# Altium PCB 3ER_PCB.PcbDoc (part 1 of 2)
Units mil, origin at the board's own origin, x right, y up, seen from the top; angles counter-clockwise.
Board outline 3500 x 3505 mil, 2 copper layers (Top Layer, Bottom Layer); 87 components, 62 nets, 335 pads, 137 vias.
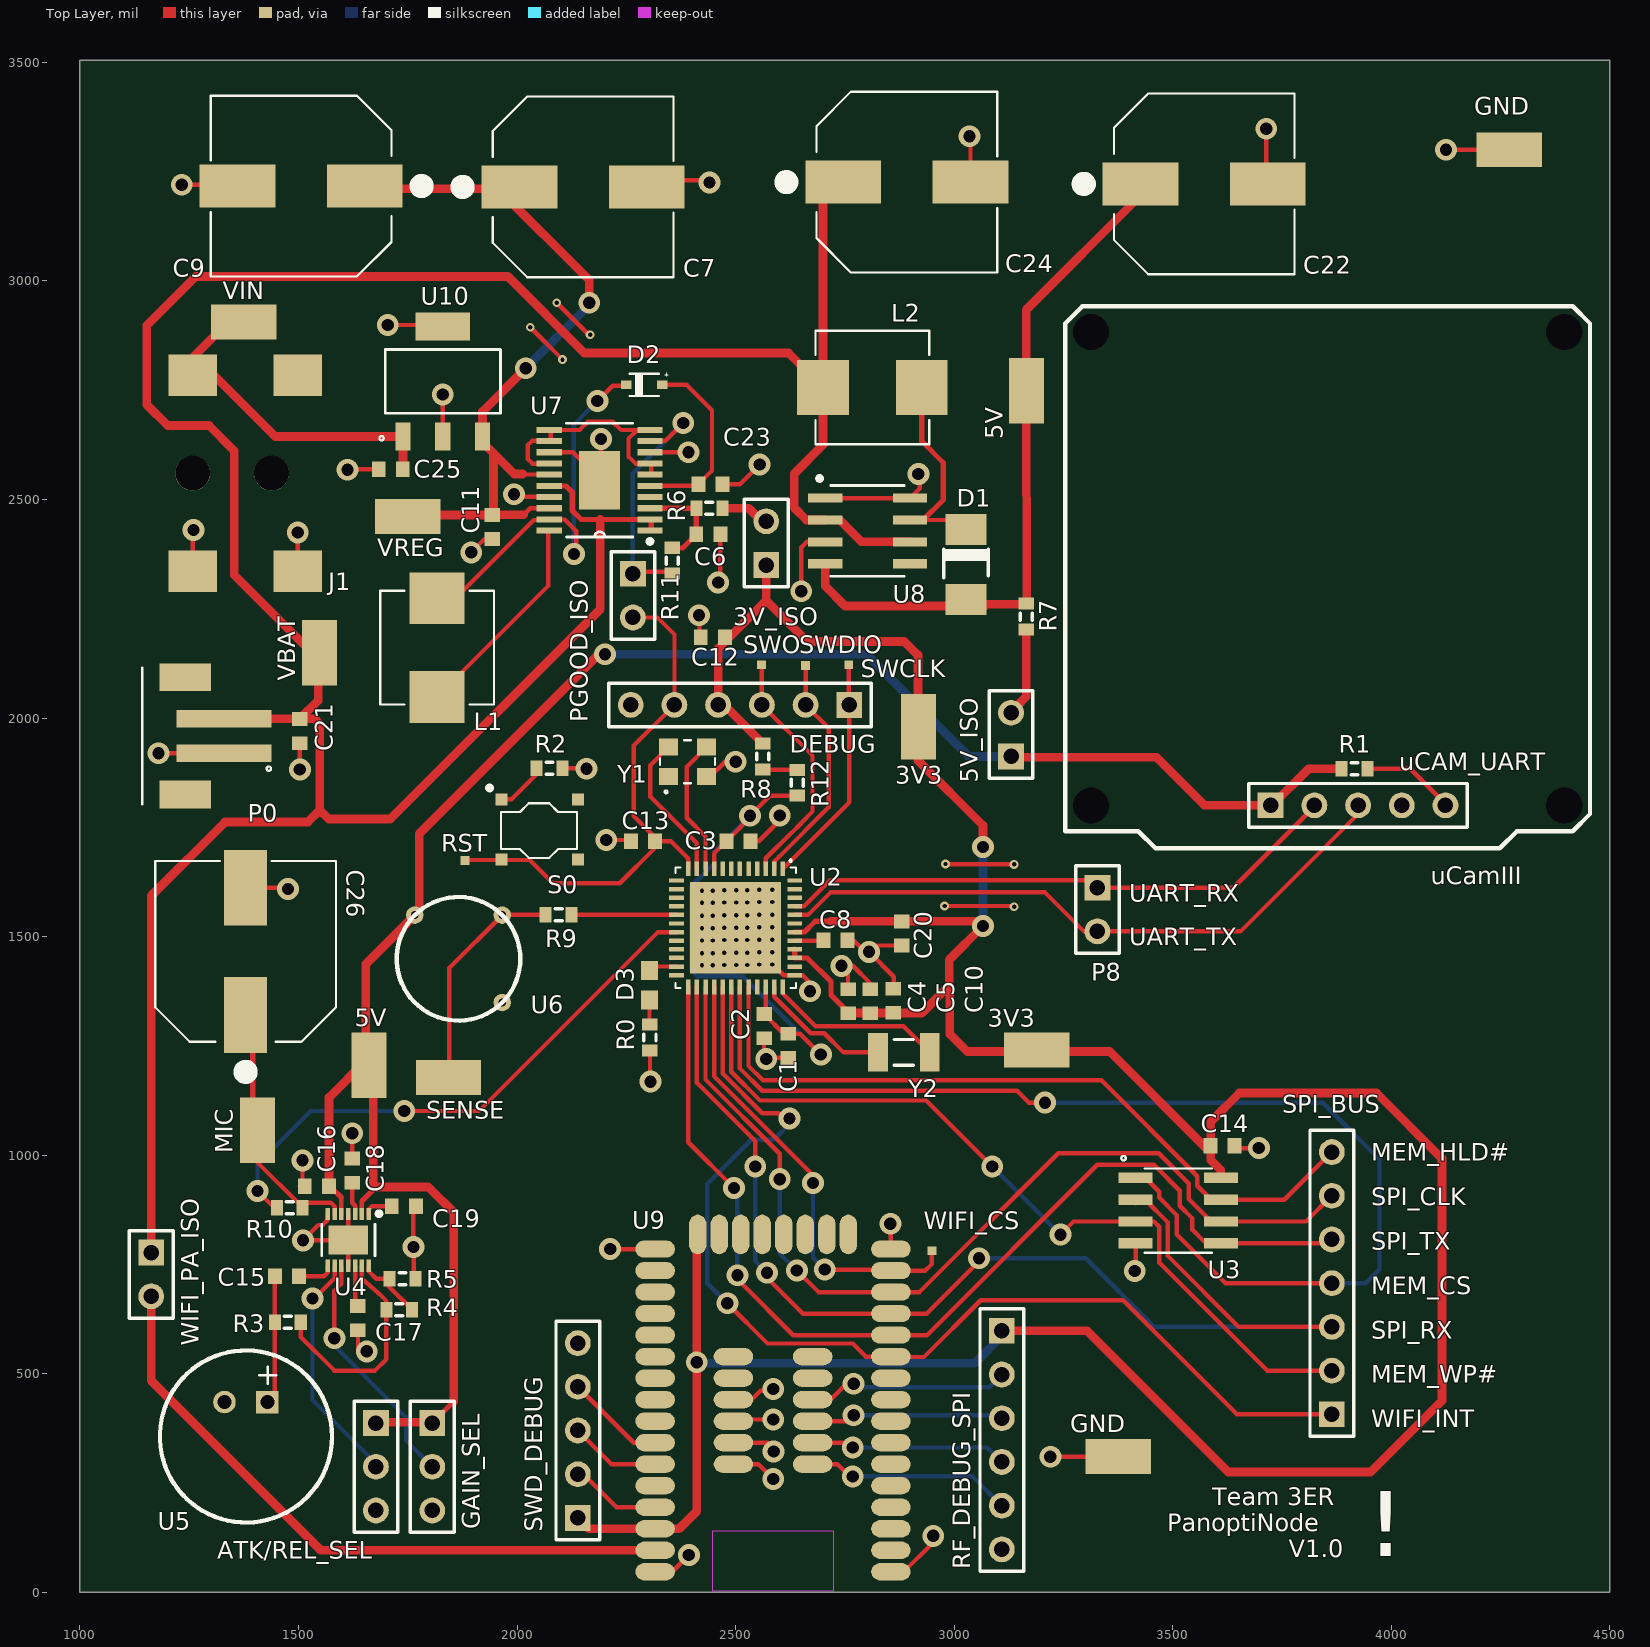
[diagram p0: Top Layer view]
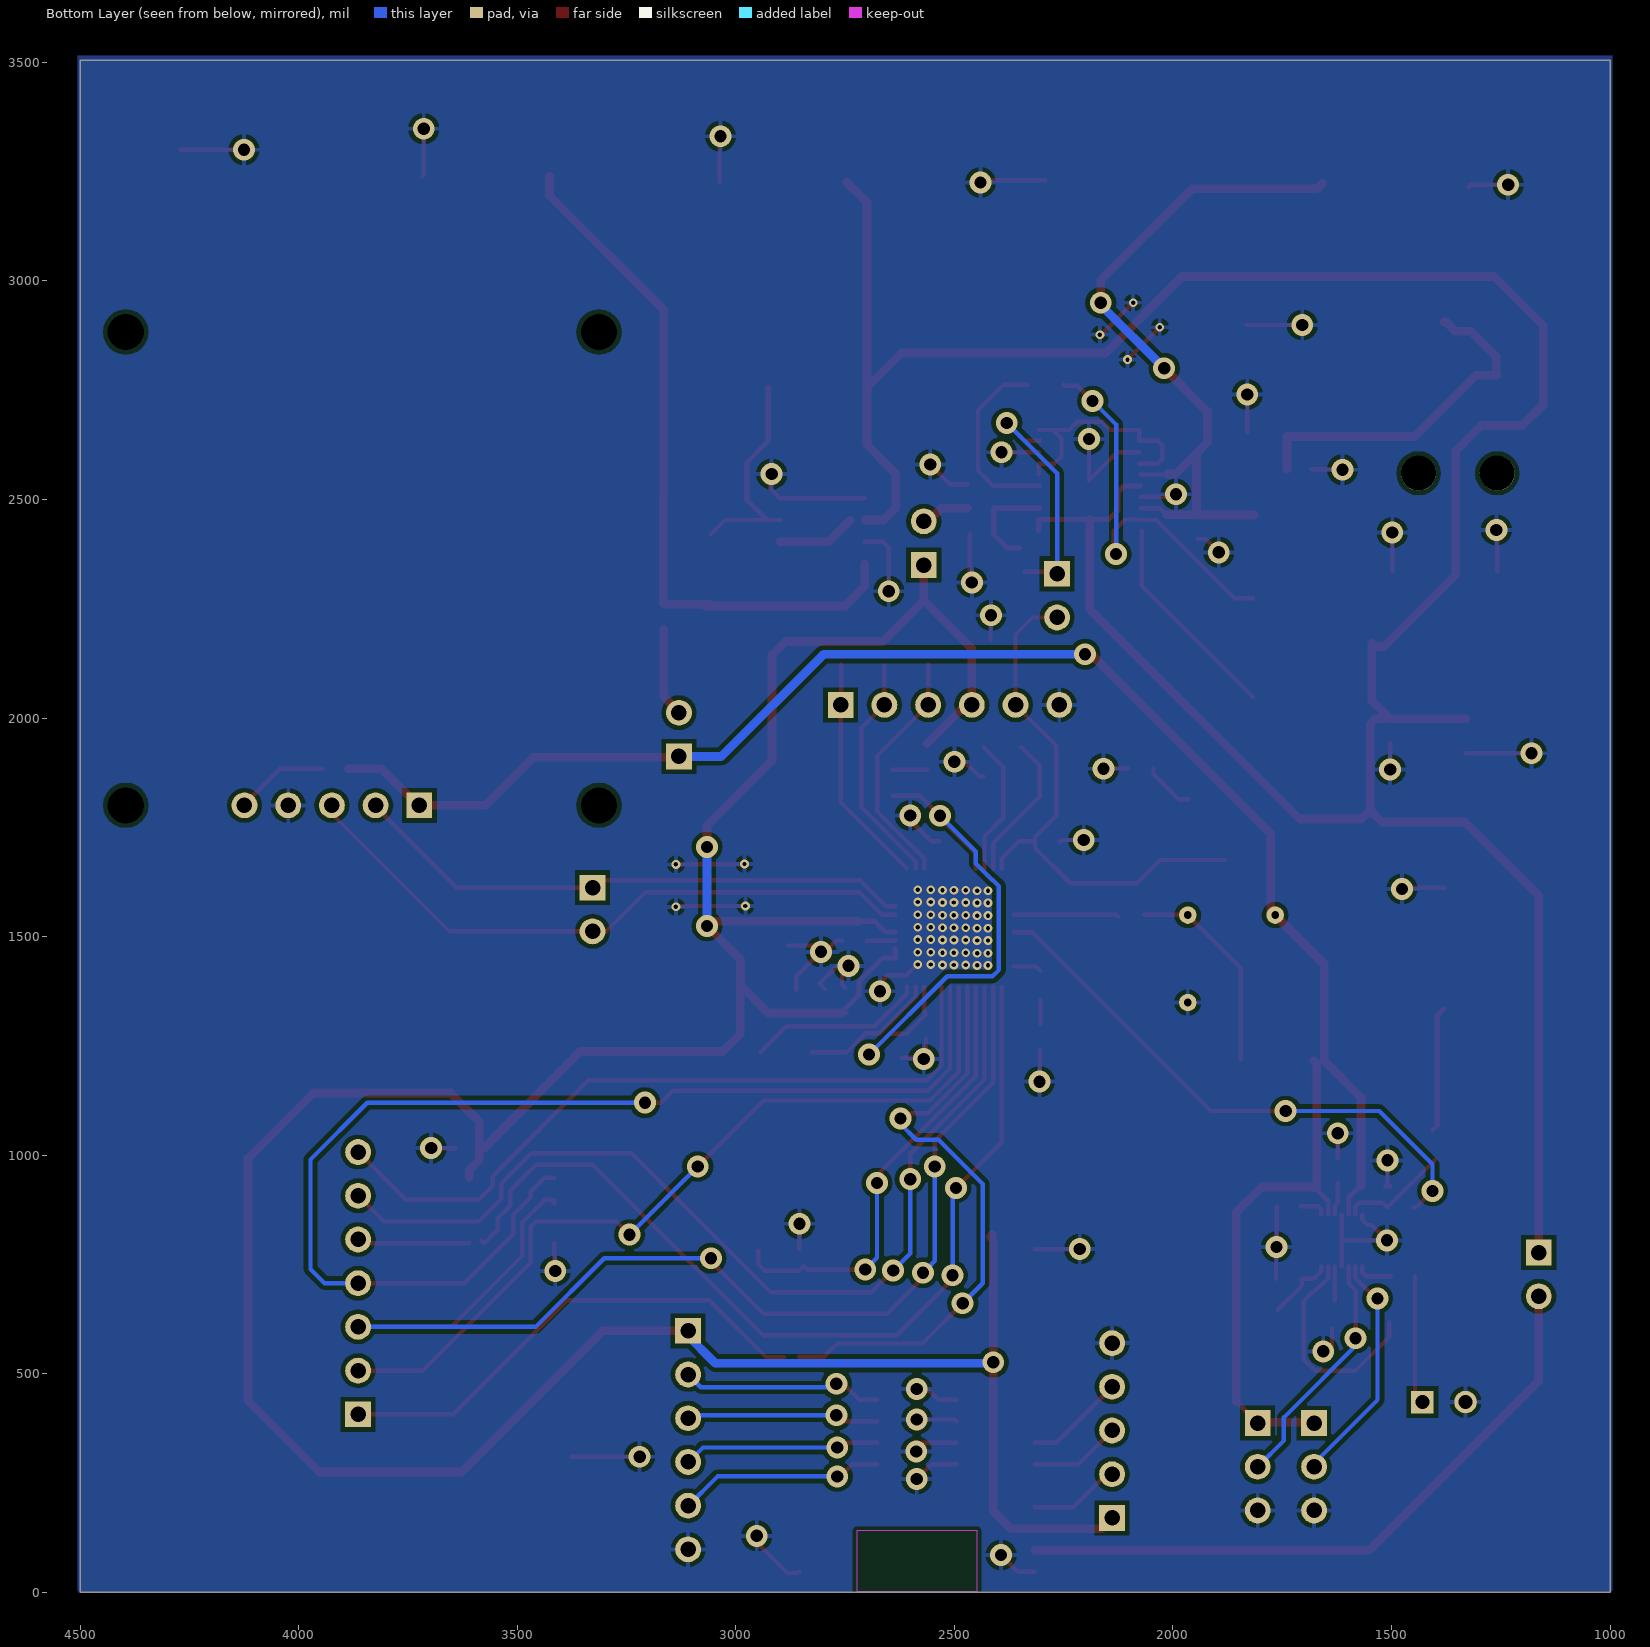
[diagram p1: Bottom Layer view, seen from below]

## Layer stack, top to bottom
Top Solder: solder mask 0.4, Solder Resist, Dk 3.5
Top Layer: signal copper 1.4
Dielectric 1: dielectric 12.6, FR-4, Dk 4.8
Bottom Layer: signal copper 1.4
Bottom Solder: solder mask 0.4, Solder Resist, Dk 3.5

## Board outline
1000,0 4500,0 4500,3505 1000,3505

## Design rules (kind name [scope] priority, off if disabled: settings)
Clearance Clearance_1 [InNamedPolygon('GND_L02_P002')] p1: gap=10 ignorepadtopadclearanceinfootprint=FALSE except(0: Arc-Hole Track-Hole SMDPad-Hole THPad-Hole Via-Hole Text-Hole)
Clearance [All] p2: gap=10 ignorepadtopadclearanceinfootprint=TRUE except(0: Arc-Hole Track-Hole SMDPad-Hole THPad-Hole Via-Hole Fill-Hole Poly-Hole Region-Hole Text-Hole; 5: Arc-Arc Arc-Track Arc-SMDPad Arc-THPad Track-Track Track-SMDPad Track-THPad SMDPad-SMDPad SMDPad-THPad SMDPad-Via SMDPad-Fill SMDPad-Poly SMDPad-Region SMDPad-Text THPad-THPad)
ComponentClearance uCam_Clearance [All vs HasFootprint('uCamIII')] p1: gap=0 collisioncheckmode=3 verticalgap=0 showdistances=FALSE
ComponentClearance [All] p2: gap=10 collisioncheckmode=3 verticalgap=10 showdistances=FALSE
MinimumSolderMaskSliver [All vs HasFootprint('No Footprint')] p1: minsoldermaskwidth=4
PolygonConnect Gnd_Via_Connect [IsVia AND InNet('GND');] p1: thpad.connectstyle=Direct thpad.reliefconductorwidth=10 thpad.reliefentries=4 thpad.polygonreliefangle="90 Angle" thpad.airgapwidth=10 smdpad.connectstyle=Relief smdpad.reliefconductorwidth=10 smdpad.reliefentries=4 smdpad.polygonreliefangle="90 Angle" smdpad.airgapwidth=10 via.connectstyle=Relief via.reliefconductorwidth=10 via.reliefentries=4 via.polygonreliefangle="90 Angle" via.airgapwidth=10
PolygonConnect [All] p2: connectstyle=Relief reliefconductorwidth=10 reliefentries=4 polygonreliefangle="90 Angle" airgapwidth=10
RoutingVias [All] p1: holewidth=12 width=24 viastyle="Through Hole" minholewidth=10 minwidth=20 maxholewidth=14 maxwidth=28
SilkToSilkClearance [All] p1: silktosilkclearance=4
SilkToSolderMaskClearance MotionSensorRule [All vs HasFootprint('AMN24112')] p1: minsilkscreentomaskgap=0 clearancetoexposedcopper=TRUE
SilkToSolderMaskClearance SilkToSolderMaskClearance_1 [IsPad] p2: minsilkscreentomaskgap=3 clearancetoexposedcopper=TRUE
SolderMaskExpansion [All] p1: expansion=4
Width Width_power [InNet('5V') OR InNet('VBAT') OR InNet('5V_OUT') OR InNet('DVDD') OR InNet('NetJ1_VIN0') OR InNet('NetP10_2') OR InNet('NetP11_2') OR InNet('NETC25_2') OR InNet('NetP9_2') OR InNet('NetC7_1');] p1: maxlimit=20 minlimit=10 preferedwidth=20
Width Width_signal [All] p2: maxlimit=12 minlimit=8 preferedwidth=10
26 further rules are at their usual default settings.

## Components (designator, comment, footprint, x,y, rotation, side; value= is the part's Value field where it differs from the comment)
3V3 "5019" TP380X203 2918,1980 r270 top (schematic designator TP1)
3V3 "5019" TP380X203 3189,1240 r180 top (schematic designator TP2)
3V_ISO "Header 2" HDR1X2 2570,2350 r90 top (schematic designator P9)
5V "5019" TP380X203 3165,2749 r90 top (schematic designator TP5)
5V "5019" TP380X203 1661,1206 r90 top (schematic designator TP4)
5V_ISO "Header 2" HDR1X2 3130,1912 r90 top (schematic designator P10)
ATK/REL_SEL "Header 3" HDR1X3 1677,387 r270 top (schematic designator P2)
C1 "Cap Semi" 1608[0603] 2620,1250 r90 top value=10uF
C2 "Cap Semi" 1608[0603] 2565,1295 r90 top value=10nF
C3 "Cap Semi" 1608[0603] 2506.56,1718 r180 top value=10nF
C4 "Cap Semi" 1608[0603] 2758,1352 r270 top value=10uF
C5 "Cap Semi" 1608[0603] 2808,1352 r270 top value=0.1uF
C6 "Cap Semi" 1608[0603] 2437.56,2420 r180 top value=47uF
C7 "MAL214699103E3" CAPAE1050X1050N 2151,3215 r0 top value=100uF
C8 "Cap Semi" 1608[0603] 2728.44,1491 r0 top value=1uF
C9 "MAL214699103E3" CAPAE1050X1050N 1506,3217 r180 top value=100uF
C10 "Cap Semi" 1608[0603] 2861,1353 r270 top value=0.1uF
C11 "Cap Semi" 1608[0603] 1943,2437 r90 top value=1uF
C12 "Cap Semi" 1608[0603] 2448,2185 r0 top value=10uF
C13 "Cap Semi" 1608[0603] 2288,1718 r0 top value=100nF
C14 "Cap Semi" 1608[0603] 3614,1021 r180 top value=100pF
C15 "Cap Semi" 1608[0603] 1473.56,723 r0 top value=0.1uF
C16 "" 1608[0603] 1542,929 r0 top value=1uF
C17 "" 1608[0603] 1635,627 r270 top value=0.47uF
C18 "" 1608[0603] 1623,964.56 r90 top value=2.2uF
C19 "" 1608[0603] 1741,883 r180 top value=0.1uF
C20 "Cap Semi" 1608[0603] 2880,1507 r90 top value=0.1uF
C21 "Cap Semi" 1608[0603] 1503,1970 r90 top value=1uF
C22 "MAL214699103E3" CAPAE1050X1050N 3572,3222 r0 top value=100uF
C23 "Cap Semi" 1608[0603] 2442.56,2535 r180 top value=2.2uF
C24 "MAL214699103E3" CAPAE1050X1050N 2891.67,3226 r0 top value=100uF
C25 "Cap Semi" 1608[0603] 1711,2569 r0 top value=0.1uF
C26 "MAL214699103E3" CAPAE1050X1050N 1379,1466 r90 top value=100uF
D1 "MBRS140" DO-214AC 3027,2351 r270 top
D2 "SOD2513X120N" SOD2513X120N 2291,2762 r0 top (schematic designator SchottkyDiode)
D3 "TLMO1100-GS08" 0603_TLMO1100-GS08(Primary) 2303,1388.54 r270 top
DEBUG "Header 6" HDR1X6 2760,2030 r180 top (schematic designator P1)
GAIN_SEL "Header 3" HDR1X3 1806,387 r270 top (schematic designator P3)
GND "5019" TP380X203 3375,310 r0 top (schematic designator TP8)
GND "5019" TP380X203 4270,3300 r0 top (schematic designator TP3)
J1 "" POWER_JACK_SMD 1258,2560 r0 top
L1 "Inductor" INDM7366X500 1817,2161.01 r90 top value=10uH
L2 "Inductor" INDM7366X500 2812.99,2756 r0 top value=10uH
MIC "5019" TP380X203 1406,1057 r90 top (schematic designator TP7)
P0 "B2B-PH-SM4-TB" JST_B2B-PH-SM4-TB 1329.58,1958.86 r90 top
P8 "UART_Header" HDR1X2 3327.76,1611.81 r270 top
PGOOD_ISO "Header 2" HDR1X2 2265,2330 r270 top (schematic designator P12)
R0 "Res3" J1-0603 2304,1269 r90 top value=1K
R1 "" J1-0603 3916,1884 r180 top value=0
R2 "Res3" J1-0603 2074,1885 r180 top value=1k
R3 "Res3" J1-0603 1475.53,618 r0 top value=2.2K
R4 "Res3" J1-0603 1730.53,646 r180 top value=150K
R5 "Res3" J1-0603 1738,717 r180 top value=100K
R6 "Ferrite Bead" J1-0603 2440,2480 r0 top value=0
R7 "Ferrite Bead" J1-0603 3165,2232 r90 top value=0
R8 "Ferrite Bead" J1-0603 2562,1912 r90 top value=p/n:74279266
R9 "Res3" J1-0603 2095,1550 r180 top value=0
R10 "Res3" J1-0603 1480,880 r0 top value=0
R11 "Res3" J1-0603 2355,2360 r270 top value=1M
R12 "Res3" J1-0603 2641,1852 r270 top value=1
RF_DEBUG_SPI "Header 6" HDR1X6 3109,598 r270 top (schematic designator P5)
RST "SparkFun Test Points    Bare copper test points for troubleshooting or In-Circuit-Testing. These are used by our Production team for verifying production board runs using pogo-pins on test beds.   SparkFun Products: SparkFun LSM9DS1 Breakout  SparkFun PSOC  SparkFun Load Cell Amplifier" PAD.02X.02 1881,1674 r90 top (schematic designator TP23)
S0 "TL3315NF100Q" TL3315NF100Q 2052,1745 r0 top (schematic designator S1)
SENSE "5019" TP380X203 1843,1178 r0 top (schematic designator TP6)
SPI_BUS "SPI_Header" HDR1X7 3864,407 r90 top (schematic designator P7)
SWCLK "SparkFun Test Points    Bare copper test points for troubleshooting or In-Circuit-Testing. These are used by our Production team for verifying production board runs using pogo-pins on test beds.   SparkFun Products: SparkFun LSM9DS1 Breakout  SparkFun PSOC  SparkFun Load Cell Amplifier" PAD.02X.02 2759,2122 r90 top (schematic designator TP19)
SWD_DEBUG "Header 5" HDR1X5 2139,170 r90 top (schematic designator P6)
SWDIO "SparkFun Test Points    Bare copper test points for troubleshooting or In-Circuit-Testing. These are used by our Production team for verifying production board runs using pogo-pins on test beds.   SparkFun Products: SparkFun LSM9DS1 Breakout  SparkFun PSOC  SparkFun Load Cell Amplifier" PAD.02X.02 2660,2120 r90 top (schematic designator TP20)
SWO "SparkFun Test Points    Bare copper test points for troubleshooting or In-Circuit-Testing. These are used by our Production team for verifying production board runs using pogo-pins on test beds.   SparkFun Products: SparkFun LSM9DS1 Breakout  SparkFun PSOC  SparkFun Load Cell Amplifier" PAD.02X.02 2559,2122 r90 top (schematic designator TP21)
U2 "EFM32PG12B500F1024GM48-B" QFN50P700X700X90-49N 2500,1520 r270 top
U3 "SST25VF010A" SST25VF010A 3512.56,873 r0 top
U4 "MAX9814ETD+T" DFN300X300X80-15N 1614,806 r270 top
U5 "" CMA-4544PF-W 1379.79,356.26 r90 top
U6 "AMN24112" AMN24112 1866,1449 r270 top
U7 "LTC3106" LTC3106 2189,2544 r180 top
U8 "LT1300CS8PBF" SOIC-8_S 2802,2428 r0 top
U9 "" WGM110_PAC 2585.55,415.89 r180 top
U10 "LM2937IMPX-5.0/NOPB" SOT230P700X180-4N 1830,2770 r90 top
uCAM_UART "uCamIII_HEADER" uCamIII_Header 3724,1800.2 r0 top (schematic designator U1)
uCamIII "uCamIII" uCamIII 3312.99,1800.2 r0 top
VBAT "5019" TP380X203 1548,2149 r90 top (schematic designator TP9)
VIN "5019" TP380X203 1375,2906 r0 top (schematic designator TP10)
VREG "5019" TP380X203 1750,2461 r180 top (schematic designator TP11)
WIFI_CS "SparkFun Test Points    Bare copper test points for troubleshooting or In-Circuit-Testing. These are used by our Production team for verifying production board runs using pogo-pins on test beds.   SparkFun Products: SparkFun LSM9DS1 Breakout  SparkFun PSOC  SparkFun Load Cell Amplifier" PAD.02X.02 2949,781 r0 top (schematic designator 15)
WIFI_PA_ISO "Header 2" HDR1X2 1163,777 r270 top (schematic designator P11)
Y1 "ASFLMB-40.000MHZ-LR-T" OSCSC320X250X100N 2390,1900 r90 top
Y2 "32.768K" XTAL320X150X90N 2885,1235 r180 top

## Footprints (in the part's own frame and the unit in brackets; to place one, negate y for a bottom-side part, rotate by r counter-clockwise, add the part's x,y. Pads: shape width x height; smd on the part's side, far side on the other; paste and mask are expansions set on the pad)
0603_TLMO1100-GS08(Primary) [mm]
  rect 1.1x1 smd: 1(-0.85,0) 2(0.85,0)
1608[0603] [mm] "Chip Capacitor, Body 1.6x0.8mm, IPC High Density"
  rect 0.8x0.9 smd: 1(-0.7,0) 2(0.7,0)
  body extent -0.87,-0.48 0.87,0.48, height 1.3
AMN24112 [mil]
  round 40 hole 18: 1(-100,-100) 2(100,100) 3(-100,100)
  silkscreen extent -141,-141 141,141
CAPAE1050X1050N [mm]
  rect 4.4x2.5 smd: 1(-3.7,0) 2(3.7,0)
  silkscreen extent -7.35,-5.25 5.25,5.25
CMA-4544PF-W [mm]
  rect 1.308x1.308 hole 0.8: 1(2,-1.25)
  round 1.308 hole 0.8: 2(2,1.25)
  silkscreen extent -5,-5 5,5
DFN300X300X80-15N [mil]
  rect 28x10 smd: 1(-59,47) 2(-59,31) 3(-59,16) 4(-59,0) 5(-59,-16) 6(-59,-31) 7(-59,-47) 8(59,-47) 9(59,-31) 10(59,-16) 11(59,0) 12(59,16) 13(59,31) 14(59,47)
  rect 67x91 smd: 15(0,0)
  silkscreen extent -65,-61 36,75
DO-214AC [mm]
  rect 1.8x2.4 smd: 1(-2.025,0) 2(2.025,0)
  silkscreen extent -0.89,-1.3 0.76,1.3
HDR1X2 [mm] "Connector; Header; 2 Position"
  rect 1.5x1.5 hole 0.9: 1(0,0)
  round 1.5 hole 0.9: 2(2.54,0)
  silkscreen extent -1.27,-1.27 3.81,1.27
HDR1X3 [mm] "Connector; Header; 3 Position"
  rect 1.5x1.5 hole 0.9: 1(0,0)
  round 1.5 hole 0.9: 2(2.54,0) 3(5.08,0)
  silkscreen extent -1.27,-1.27 6.35,1.27
HDR1X5 [mm] "Connector; Header; 5 Position"
  rect 1.5x1.5 hole 0.9: 1(0,0)
  round 1.5 hole 0.9: 2(2.54,0) 3(5.08,0) 4(7.62,0) 5(10.16,0)
  silkscreen extent -1.27,-1.27 11.43,1.27
HDR1X6 [mm] "Connector; Header; 6 Position"
  rect 1.5x1.5 hole 0.9: 1(0,0)
  round 1.5 hole 0.9: 2(2.54,0) 3(5.08,0) 4(7.62,0) 5(10.16,0) 6(12.7,0)
  silkscreen extent -1.27,-1.27 13.97,1.27
HDR1X7 [mm] "Connector; Header; 7 Position"
  rect 1.5x1.5 hole 0.9: 1(0,0)
  round 1.5 hole 0.9: 2(2.54,0) 3(5.08,0) 4(7.62,0) 5(10.16,0) 6(12.7,0) 7(15.24,0)
  silkscreen extent -1.27,-1.27 16.51,1.27
INDM7366X500 [mm]
  rect 3x3.2 smd: 1(-2.87,0) 2(2.87,0)
  silkscreen extent -3.3,-3.3 3.3,3.3
J1-0603 [mm] "Chip Resistor, Body 1.6x0.8mm, IPC High Density"
  rect 0.7x0.9 smd: 1(-0.75,0) 2(0.75,0)
  silkscreen extent -0.2,-0.35 0.2,0.35, body extent -0.85,-0.48 0.85,0.48, height 0.9
JST_B2B-PH-SM4-TB [mm]
  rect 1x5.5 smd: 1(-1,0) 2(1,0)
  rect 1.6x3 smd: P1(-3.4,2.25) P2(3.4,2.25)
  silkscreen extent -3.98,-2.73 3.98,4.75
LTC3106 [mil]
  rect 58x14 smd: 1(-115,115) 2(-115,90) 3(-115,64) 4(-115,38) 5(-115,13) 6(-115,-13) 7(-115,-38) 8(-115,-64) 9(-115,-90) 10(-115,-115) 11(115,-115) 12(115,-90) 13(115,-64) 14(115,-38) 15(115,-13) 16(115,13) 17(115,38) 18(115,64) 19(115,90) 20(115,115)
  rect 94x134 smd: 21(0,0)
  silkscreen extent -120,-130 76,145
OSCSC320X250X100N [mm]
  rect 0.98x1.1 smd: 1(-0.85,1.1) 2(-0.85,-1.1) 3(0.85,-1.1) 4(0.85,1.1)
  silkscreen extent -1.84,-1.6 1.25,1.6
PAD.02X.02 [mil]
  rect 20x20 smd: P$1(0,0)
POWER_JACK_SMD [mil]
  round 80 hole 80 unplated: 1(0,0) 1(180,0)
  rect 110.24x94.49 smd: GND(0,-224.41) P$4(240.16,-224.41) VIN0(0,224.41) VIN1(240.16,224.41)
QFN50P700X700X90-49N [mm]
  rect 5.3x5.3 smd: 0(0,0)
  rect 0.86x0.26 smd: 1(-3.435,2.75) 2(-3.435,2.25) 3(-3.435,1.75) 4(-3.435,1.25) 5(-3.435,0.75) 6(-3.435,0.25) 7(-3.435,-0.25) 8(-3.435,-0.75) 9(-3.435,-1.25) 10(-3.435,-1.75) 11(-3.435,-2.25) 12(-3.435,-2.75) 25(3.435,-2.75) 26(3.435,-2.25) 27(3.435,-1.75) 28(3.435,-1.25) 29(3.435,-0.75) 30(3.435,-0.25) 31(3.435,0.25) 32(3.435,0.75) 33(3.435,1.25) 34(3.435,1.75) 35(3.435,2.25) 36(3.435,2.75)
  rect 0.26x0.86 smd: 13(-2.75,-3.435) 14(-2.25,-3.435) 15(-1.75,-3.435) 16(-1.25,-3.435) 17(-0.75,-3.435) 18(-0.25,-3.435) 19(0.25,-3.435) 20(0.75,-3.435) 21(1.25,-3.435) 22(1.75,-3.435) 23(2.25,-3.435) 24(2.75,-3.435) 37(2.75,3.435) 38(2.25,3.435) 39(1.75,3.435) 40(1.25,3.435) 41(0.75,3.435) 42(0.25,3.435) 43(-0.25,3.435) 44(-0.75,3.435) 45(-1.25,3.435) 46(-1.75,3.435) 47(-2.25,3.435) 48(-2.75,3.435)
  silkscreen extent -4,-3.5 3.5,3.5
SOD2513X120N [mm]
  rect 0.6x0.5 smd: 1(-1.05,0) 2(1.05,0)
  silkscreen extent -0.85,-0.65 1.4,0.7
SOIC-8_S [mil]
  rect 78x21 smd: 1(-97,75) 2(-97,25) 3(-97,-25) 4(-97,-75) 5(97,-75) 6(97,-25) 7(97,25) 8(97,75)
  silkscreen extent -115,-104 84,125
SOT230P700X180-4N [mil]
  rect 64x35 smd: 1(-126,91) 2(-126,0) 3(-126,-91)
  rect 64x125 smd: 4(126,0)
  silkscreen extent -135,-132 73,145
SST25VF010A [mm]
  rect 1.97x0.6 smd: 1(-2.475,1.905) 2(-2.475,0.635) 3(-2.475,-0.635) 4(-2.475,-1.905) 5(2.475,-1.905) 6(2.475,-0.635) 7(2.475,0.635) 8(2.475,1.905)
  silkscreen extent -3.31,-2.45 1.95,3.18
TL3315NF100Q [mm]
  rect 0.7x0.7 smd: 1(-2.225,1.75) 2(2.225,1.75) 3(-2.225,-1.75) 4(2.225,-1.75)
  silkscreen extent -3.05,-1.65 2.16,2.54
TP380X203 [mm]
  rect 3.8x2.03 smd: 1(0,0)
uCamIII [mil] "Camera Drill Holes"
  round 60 hole 82.68 unplated: 1(1082.68,0) 2(1082.68,1082.68) 3(0,1082.68) 4(0,0)
  silkscreen extent -59,-98 1142,1142
uCamIII_Header [mm] "Connector; Header; 5 Position"
  rect 1.5x1.5 hole 0.9: 1(0,0)
  round 1.5 hole 0.9: 2(2.54,0) 3(5.08,0) 4(7.62,0) 5(10.16,0)
  silkscreen extent -1.27,-1.27 11.43,1.27
WGM110_PAC [mm]
  rrect100% 2.3x1 smd: P$1(-6.85,9.375) P$2(-6.85,8.125) P$3(-6.85,6.875) P$4(-6.85,5.625) P$5(-6.85,4.375) P$6(-6.85,3.125) P$7(-6.85,1.875) P$8(-6.85,0.625) P$9(-6.85,-0.625) P$10(-6.85,-1.875) P$11(-6.85,-3.125) P$12(-6.85,-4.375) P$13(-6.85,-5.625) P$14(-6.85,-6.875) P$15(-6.85,-8.125) P$16(-6.85,-9.375) P$25(6.85,-9.375) P$26(6.85,-8.125) P$27(6.85,-6.875) P$28(6.85,-5.625) P$29(6.85,-4.375) P$30(6.85,-3.125) P$31(6.85,-1.875) P$32(6.85,-0.625) P$33(6.85,0.625) P$34(6.85,1.875) P$35(6.85,3.125) P$36(6.85,4.375) P$37(6.85,5.625) P$38(6.85,6.875) P$39(6.85,8.125) P$40(6.85,9.375) P$41(-2.3,3.125) P$42(2.3,3.125) P$43(-2.3,1.875) P$44(2.3,1.875) P$45(-2.3,0.625) P$46(2.3,0.625) P$47(-2.3,-0.625) P$48(2.3,-0.625) P$49(-2.3,-1.875) P$50(2.3,-1.875) P$51(-2.3,-3.125) P$52(2.3,-3.125)
  rrect100% 1x2.3 smd: P$17(-4.375,-10.225) P$18(-3.125,-10.225) P$19(-1.875,-10.225) P$20(-0.625,-10.225) P$21(0.625,-10.225) P$22(1.875,-10.225) P$23(3.125,-10.225) P$24(4.375,-10.225)
  Top Layer keep-out region: -3.5,7 -3.5,10.5 3.5,10.5 3.5,7
  Bottom Layer keep-out region: -3.5,7 -3.5,10.5 3.5,10.5 3.5,7
XTAL320X150X90N [mm]
  rect 1.15x2.25 smd: 1(-1.5,0) 2(1.5,0)
  silkscreen extent -0.55,-0.75 0.55,0.75

## Part data
3V3 3V3 GND MIC SENSE VIN: "Phosphor Bronze Contact Miniature Silver Plated Surface Mount Test Points", Package=None, Supplier Part Number 1=36-5019DKR-ND, Digi-Key_Part_Number=36-5019CT-ND, Digi-Key_Purchase_URL=https://www.digikey.com/product-detail/en/keystone-electronics/5019/36-5019CT-ND/3907344?WT.z_cid=ref_snapeda, MF=Keystone, MP=5019, Supplier 1=Digi-Key
3V_ISO 5V_ISO PGOOD_ISO: "Header, 2-Pin", Supplier Part Number 1=732-5327-ND, LatestRevisionDate=17-Jul-2002, LatestRevisionNote="Re-released for DXP Platform.", Publisher="Altium Limited", Supplier 1=Digi-Key
5V 5V GND VBAT VREG: "Phosphor Bronze Contact Miniature Silver Plated Surface Mount Test Points", Package=None, Supplier Part Number 1=36-5019CT-ND, Digi-Key_Part_Number=36-5019CT-ND, Digi-Key_Purchase_URL=https://www.digikey.com/product-detail/en/keystone-electronics/5019/36-5019CT-ND/3907344?WT.z_cid=ref_snapeda, MF=Keystone, MP=5019, Supplier 1=Digi-Key
ATK/REL_SEL GAIN_SEL: "Header, 3-Pin", LatestRevisionDate=17-Jul-2002, LatestRevisionNote="Re-released for DXP Platform.", Publisher="Altium Limited"
C1: "Capacitor (Semiconductor SIM Model)", Supplier Part Number 1=1276-1948-1-ND, LatestRevisionDate=29-May-2009, LatestRevisionNote="IPC-7351 Footprint Added.", PackageDescription="Chip Capacitor", PackageReference=C1206, Published=8-Jun-2000, Publisher="Altium Limited", Supplier 1=Digi-Key
C2: "Capacitor (Semiconductor SIM Model)", Supplier Part Number 1=311-1085-1-ND, LatestRevisionDate=29-May-2009, LatestRevisionNote="IPC-7351 Footprint Added.", PackageDescription="Chip Capacitor", PackageReference=C1206, Published=8-Jun-2000, Publisher="Altium Limited", Supplier 1=Digi-Key
C3: "Capacitor (Semiconductor SIM Model)", Supplier Part Number 1=311-1085-6-ND, LatestRevisionDate=29-May-2009, LatestRevisionNote="IPC-7351 Footprint Added.", PackageDescription="Chip Capacitor", PackageReference=C1206, Published=8-Jun-2000, Publisher="Altium Limited", Supplier 1=Digi-Key
C4 C12: "Capacitor (Semiconductor SIM Model)", Supplier Part Number 1=1276-1948-6-ND, LatestRevisionDate=29-May-2009, LatestRevisionNote="IPC-7351 Footprint Added.", PackageDescription="Chip Capacitor", PackageReference=C1206, Published=8-Jun-2000, Publisher="Altium Limited", Supplier 1=Digi-Key
C5 C10 C20 C25: "Capacitor (Semiconductor SIM Model)", Supplier Part Number 1=311-1088-6-ND, LatestRevisionDate=29-May-2009, LatestRevisionNote="IPC-7351 Footprint Added.", PackageDescription="Chip Capacitor", PackageReference=C1206, Published=8-Jun-2000, Publisher="Altium Limited", Supplier 1=Digi-Key
C6: "Capacitor (Semiconductor SIM Model)", Supplier Part Number 1=478-11180-2-ND, LatestRevisionDate=29-May-2009, LatestRevisionNote="IPC-7351 Footprint Added.", PackageDescription="Chip Capacitor", PackageReference=C1206, Published=8-Jun-2000, Publisher="Altium Limited", Supplier 1=Digi-Key
C7 C9 C22 C24 C26: "146 CTI Series 50 V 100 uF 10 x 10 x 10 mm SMT CAN Electrolytic Capacitor", Package="Radial Vishay", Supplier Part Number 1=4437PHCT-ND, Availability=Good, MF=Vishay, MP=MAL214699103E3, Price="1.31 USD", Supplier 1=Digi-Key
C8 C11 C21: "Capacitor (Semiconductor SIM Model)", Supplier Part Number 1=1276-1946-6-ND, LatestRevisionDate=29-May-2009, LatestRevisionNote="IPC-7351 Footprint Added.", PackageDescription="Chip Capacitor", PackageReference=C1206, Published=8-Jun-2000, Publisher="Altium Limited", Supplier 1=Digi-Key
C13 C15: "Capacitor (Semiconductor SIM Model)", Supplier Part Number 1=311-1088-1-ND, LatestRevisionDate=29-May-2009, LatestRevisionNote="IPC-7351 Footprint Added.", PackageDescription="Chip Capacitor", PackageReference=C1206, Published=8-Jun-2000, Publisher="Altium Limited", Supplier 1=Digi-Key
C14: "Capacitor (Semiconductor SIM Model)", Supplier Part Number 1=399-7824-1-ND, LatestRevisionDate=29-May-2009, LatestRevisionNote="IPC-7351 Footprint Added.", PackageDescription="Chip Capacitor", PackageReference=C1206, Published=8-Jun-2000, Publisher="Altium Limited", Supplier 1=Digi-Key
C16: library part "Cap Semi", "Capacitor (Semiconductor SIM Model)", Supplier Part Number 1=1276-1946-1-ND, LatestRevisionDate=29-May-2009, LatestRevisionNote="IPC-7351 Footprint Added.", PackageDescription="Chip Capacitor", PackageReference=C1206, Published=8-Jun-2000, Publisher="Altium Limited", Supplier 1=Digi-Key
C17: library part "Cap Semi", "Capacitor (Semiconductor SIM Model)", Supplier Part Number 1=490-3295-1-ND, LatestRevisionDate=29-May-2009, LatestRevisionNote="IPC-7351 Footprint Added.", PackageDescription="Chip Capacitor", PackageReference=C1206, Published=8-Jun-2000, Publisher="Altium Limited", Supplier 1=Digi-Key
C18: library part "Cap Semi", "Capacitor (Semiconductor SIM Model)", Supplier Part Number 1=587-2983-6-ND, LatestRevisionDate=29-May-2009, LatestRevisionNote="IPC-7351 Footprint Added.", PackageDescription="Chip Capacitor", PackageReference=C1206, Published=8-Jun-2000, Publisher="Altium Limited", Supplier 1=Digi-Key
C19: library part "Cap Semi", "Capacitor (Semiconductor SIM Model)", Supplier Part Number 1=311-1088-1-ND, LatestRevisionDate=29-May-2009, LatestRevisionNote="IPC-7351 Footprint Added.", PackageDescription="Chip Capacitor", PackageReference=C1206, Published=8-Jun-2000, Publisher="Altium Limited", Supplier 1=Digi-Key
C23: "Capacitor (Semiconductor SIM Model)", Supplier Part Number 1=587-2983-6-ND, LatestRevisionDate=29-May-2009, LatestRevisionNote="IPC-7351 Footprint Added.", PackageDescription="Chip Capacitor", PackageReference=C1206, Published=8-Jun-2000, Publisher="Altium Limited", Supplier 1=Digi-Key
D1: Supplier Part Number 1=MBRS140T3GOSDKR-ND, Supplier 1=Digi-Key
D2: Supplier Part Number 1=ZLLS400TADKR-ND, Supplier 1=Digi-Key
D3: "Orange 0603 160° 80 mcd 2.1 V 30 mA Non Diffused Surface Mount LED", Package="0603 Vishay", Supplier Part Number 1=751-1174-6-ND, Digi-Key_Part_Number=751-1174-1-ND, Digi-Key_Purchase_URL=https://www.digikey.com/product-detail/en/vishay-semiconductor-opto-division/TLMO1100-GS08/751-1174-1-ND/1681457?WT.z_cid=ref_snapeda, MF=Vishay, MP=TLMO1100-GS08, Supplier 1=Digi-Key
DEBUG: "Header, 6-Pin", Supplier Part Number 1=732-5327-ND, LatestRevisionDate=17-Jul-2002, LatestRevisionNote="Re-released for DXP Platform.", Publisher="Altium Limited", Supplier 1=Digi-Key
J1: library part POWER_JACKSMD, PROD_ID=CONN-08106, SF_ID=PRT-12748
L1 L2: Supplier Part Number 1=732-1025-1-ND, Code_IEC=1005, Code_JEITA=0402, LatestRevisionDate=29-May-2009, LatestRevisionNote="IPC-7351 Footprint Added.", PackageDescription="Chip Inductor", PackageReference=0402-A, Published=8-Jun-2000, Publisher="Altium Limited", Supplier 1=Digi-Key
P0: Package=None, Availability=Unavailable, MF=JST, MP=B2B-PH-SM4-TB, Price="0.23 USD"
P8: library part "Header 2", "Header, 2-Pin", Supplier Part Number 1=732-5327-ND, LatestRevisionDate=17-Jul-2002, LatestRevisionNote="Re-released for DXP Platform.", Publisher="Altium Limited", Supplier 1=Digi-Key
R0 R9 R10: "Resistor", Supplier Part Number 1=311-0.0GRDKR-ND, LatestRevisionDate=29-May-2009, LatestRevisionNote="IPC-7351 Footprint Added.", PackageDescription="Chip Resistor", PackageReference=J1-0603, Published=8-Jun-2000, Publisher="Altium Limited", Supplier 1=Digi-Key
R1: library part Res3, "Resistor", Supplier Part Number 1=311-0.0GRDKR-ND, LatestRevisionDate=29-May-2009, LatestRevisionNote="IPC-7351 Footprint Added.", PackageDescription="Chip Resistor", PackageReference=J1-0603, Published=8-Jun-2000, Publisher="Altium Limited", Supplier 1=Digi-Key
R2: "Resistor", Supplier Part Number 1=311-1.0KGRCT-ND, LatestRevisionDate=29-May-2009, LatestRevisionNote="IPC-7351 Footprint Added.", PackageDescription="Chip Resistor", PackageReference=J1-0603, Published=8-Jun-2000, Publisher="Altium Limited", Supplier 1=Digi-Key
R3: "Resistor", LatestRevisionDate=29-May-2009, LatestRevisionNote="IPC-7351 Footprint Added.", PackageDescription="Chip Resistor", PackageReference=J1-0603, Published=8-Jun-2000, Publisher="Altium Limited"
R4: "Resistor", Supplier Part Number 1=311-1088-1-ND, LatestRevisionDate=29-May-2009, LatestRevisionNote="IPC-7351 Footprint Added.", PackageDescription="Chip Resistor", PackageReference=J1-0603, Published=8-Jun-2000, Publisher="Altium Limited", Supplier 1=Digi-Key
R5: "Resistor", Supplier Part Number 1=311-100KHRCT-ND, LatestRevisionDate=29-May-2009, LatestRevisionNote="IPC-7351 Footprint Added.", PackageDescription="Chip Resistor", PackageReference=J1-0603, Published=8-Jun-2000, Publisher="Altium Limited", Supplier 1=Digi-Key
R6 R7: library part Res3, "Resistor", Supplier Part Number 1=732-4484-6-ND, LatestRevisionDate=29-May-2009, LatestRevisionNote="IPC-7351 Footprint Added.", PackageDescription="Chip Resistor", PackageReference=J1-0603, Published=8-Jun-2000, Publisher="Altium Limited", Supplier 1=Digi-Key
R8: library part Res3, "Resistor", Supplier Part Number 1=732-4484-1-ND, LatestRevisionDate=29-May-2009, LatestRevisionNote="IPC-7351 Footprint Added.", PackageDescription="Chip Resistor", PackageReference=J1-0603, Published=8-Jun-2000, Publisher="Altium Limited", Supplier 1=Digi-Key
R11: "Resistor", Supplier Part Number 1=311-1.00MHRDKR-ND, LatestRevisionDate=29-May-2009, LatestRevisionNote="IPC-7351 Footprint Added.", PackageDescription="Chip Resistor", PackageReference=J1-0603, Published=8-Jun-2000, Publisher="Altium Limited", Supplier 1=Digi-Key
R12: "Resistor", Supplier Part Number 1=311-1.00HRDKR-ND, LatestRevisionDate=29-May-2009, LatestRevisionNote="IPC-7351 Footprint Added.", PackageDescription="Chip Resistor", PackageReference=J1-0603, Published=8-Jun-2000, Publisher="Altium Limited", Supplier 1=Digi-Key
RF_DEBUG_SPI: "Header, 6-Pin", LatestRevisionDate=17-Jul-2002, LatestRevisionNote="Re-released for DXP Platform.", Publisher="Altium Limited"
RST SWCLK: library part TEST-POINT2, Supplier Part Number 1=36-5019DKR-ND, Supplier 1=Digi-Key
S0: "TL3315 Series SPST 1 N Round Button J-Bend SMT Low Profile Tactile Switch", Package=None, Availability=Good, MF=E-Switch, MP=TL3315NF100Q, Price="0.13 USD"
SPI_BUS: library part "Header 7", "Header, 7-Pin", Supplier Part Number 1=732-5327-ND, LatestRevisionDate=17-Jul-2002, LatestRevisionNote="Re-released for DXP Platform.", Publisher="Altium Limited", Supplier 1=Digi-Key
SWD_DEBUG: "Header, 5-Pin", LatestRevisionDate=17-Jul-2002, LatestRevisionNote="Re-released for DXP Platform.", Publisher="Altium Limited"
SWDIO SWO WIFI_CS: library part TEST-POINT2, Supplier Part Number 1=36-5019CT-ND, Supplier 1=Digi-Key
U2: "MCU 32-bit ARM Cortex M4 RISC 1024KB Flash 3.3V 48-Pin QFN EP", Package="QFN-48 Silicon Labs", Supplier Part Number 1=336-3941-ND, Availability=Warning, MF="Silicon Labs", MP=EFM32PG12B500F1024GM48-B, Price="5.00 USD", Supplier 1=Digi-Key
U3: Supplier Part Number 1=SST25VF010A-33-4C-SAE-ND, Supplier 1=Digi-Key
U4: "Audio Amp Microphone 1-CH Mono Class-AB 14-Pin TDFN EP T/R", Package="TDFN-14 Maxim Integrated", Supplier Part Number 1=MAX9814ETD+TDKR-ND, Availability=Good, MF="Maxim Integrated", MP=MAX9814ETD+T, Price="0.92 USD", Supplier 1=Digi-Key
U5: library part Component_1, Supplier Part Number 1=102-1721-ND, Supplier 1=Digi-Key
U6: Supplier Part Number 1=255-1818-ND, Supplier 1=Digi-Key
U7: Supplier Part Number 1=LTC3106EUDC#PBF-ND, Supplier 1=Digi-Key
U8: "PMIC - DC/DC voltage regulator Linear Technology LT1300CS8%23PBF Boost%2C Converter/amplifier SOIC 8", Package="SO-8 Linear Technology", Availability=Warning, MF="Linear Technology", MP=LT1300CS8#PBF, Price="4.13 USD"
U9: library part WGM110_DEV, Supplier Part Number 1=336-4136-1-ND, Supplier 1=Digi-Key, Supplier 2=Digi-Key
U10: "LDO Regulator Pos 5V 0.5A Automotive 4-Pin(3+Tab) SOT-223 T/R", Package="SOT-223 Texas Instruments", Supplier Part Number 1=LT1300CS8#PBF-ND, Availability=Good, MF="Texas Instruments", MP=LM2937IMPX-5.0/NOPB, Price="1.07 USD", Supplier 1=Digi-Key
uCAM_UART: "just a pin header for components", Supplier Part Number 1=1613-1369-ND, Supplier 1=Digi-Key
WIFI_PA_ISO: "Header, 2-Pin", LatestRevisionDate=17-Jul-2002, LatestRevisionNote="Re-released for DXP Platform.", Publisher="Altium Limited"
Y1: "Oscillator MEMS 40MHz ?25ppm (Stability) 15pF 55% 1.8V/2.5V/3.3V Automotive 4-Pin QFN SMD T/R", Package="SMD-4 Abracon", Supplier Part Number 1=535-11000-1-ND, Availability=Good, MF=Abracon, MP=ASFLMB-40.000MHZ-LR-T, Price="1.39 USD", Supplier 1=Digi-Key
Y2: library part ECS-.327-12.5-34B-TR, Package="SMD-2 ECS International", Supplier Part Number 1=520-ECS-327-12.5-34B, Digi-Key_Part_Number=XC1617CT-ND, Digi-Key_Purchase_URL=https://www.digikey.com/product-detail/en/ecs-inc/ECS-.327-12.5-34B-TR/XC1617CT-ND/1693786?WT.z_cid=ref_snapeda, MF="ECS International", MP=ECS-.327-12.5-34B-TR, Supplier 1=Mouser

## Via types
v1: diameter 50, hole 28, Top Layer to Bottom Layer, 80 vias
v2: diameter 20, hole 10, Top Layer to Bottom Layer, 57 vias

## Nets (pads, with @x,y where several pads share a name; then routed paths per layer and width w, separated by ;. In a path a pad name is that pad's centre, name@x,y a point inside that pad or via, vN(x,y) a via of type N, cw(c..) or ccw(c..) an arc to the next point about the centre after c; other vN are vias at no path point)
5V: 5V.1@1661,1206 5V_ISO.1 ATK/REL_SEL.1 C16.2 GAIN_SEL.1 R1.2 U4.2 U4.5 U6.1 uCAM_UART.1 | length 4618.1
  Top Layer w10: U4.5@1598,864 U4.5 1598,903 ; U4.2@1645,864 U4.2 1645,895 ; GAIN_SEL.1@1804,389 GAIN_SEL.1
  Top Layer w12: C16.2@1579,922 1598,903 ; 1645,895 1677,927 ; GAIN_SEL.1 1855,436
  Top Layer w20: C16.2 1569.56,1131.56 1654,1216 1654,1437 U6.1 1776,1559 1776,1735 2187,2146 v1(2201,2146) ; 5V.1@1677,1216 1671,1210 1671,927 1677,927 1797,927 1855,869 1855,436 ; ATK/REL_SEL.1@1683,389 GAIN_SEL.1@1804,389 ; 5V_ISO.1@3129,1910 3463,1910 3572.8,1800.2 uCAM_UART.1 3727,1800.2 3810.8,1884 R1.2
  Bottom Layer w20: v1(2201,2146) 2799,2146 3033,1912 5V_ISO.1
5V_OUT: 5V.1@3165,2749 C22.1 D1.2 R7.2 U8.4 | length 1628.1
  Top Layer w20: U8.4 2705,2302 2751,2256 D1.2@3070,2256 ; D1.2@3058,2260.28 3162.75,2260.28 3166,2263.53 3165,2749 3165,2934 3426.33,3195.33 C22.1 C22.1@3426.33,3239
ATK_REL: ATK/REL_SEL.2 U4.9 | length 541.8
  Top Layer w10: v1@1534,670 1583,719 U4.9@1583,746
  Bottom Layer w10: v1(1532,672) 1532,440 ATK/REL_SEL.2@1683,289
AVDD0: C1.2 C2.2 C3.2 R12.2 U2.9 U2.34 | length 1315.3
  Top Layer w10: U2.9 2450.79,1689.79 C3.2 2533,1772 v1(2533,1776.5) 2578.97,1822.47 R12.2 ; U2.34 2568.9,1326.46 C2.2 2610,1277.56 C1.2 2647.44,1277.56 v1(2695,1230) v1@2709,1230
  Bottom Layer w10: v1(2533,1776.5) 2451,1694.5 2451,1667 2414,1630 2412.64,1630 2398,1615.36 2398,1423.64 2412.64,1409 2516,1409 v1(2695,1230)
DVDD: 3V3.1 3V_ISO.1 C4.2 C5.2 C10.2 C12.2 C14.2 C20.2 DEBUG.4 R8.2 RF_DEBUG_SPI.1 SWD_DEBUG.1 U2.39 U2.40 U2.42 U3.8 U9.P$24 U9.P$38 | length 7689.7
  Top Layer w10: U9.P$24 U9.P$24@2416,821.14 ; C10.2@2850.88,1325 C10.2@2851,1324.88
  Top Layer w12: U2.40 U2.39 2663.88,1451.1 2718,1396.98 2718,1366 2759,1325 C4.2@2748.51,1325 ; U2.42 2657.16,1510.16 2682,1535 2718,1535
  Top Layer w20: SWD_DEBUG.1 2163.78,145.22 U9.P$38 2371.22,145.22 2411,185 v1(2411,526) 2411,806.14 2418,813.14 2413,818.14 U9.P$24 ; R8.2 2473.53,2030 DEBUG.4 2460,2159 2570,2269 ; 3V_ISO.1 2570,2269 ; 2718,1535 3055,1535 v1(3066,1524) 2989,1447 2989,1388 ; C4.2@2759,1325 C10.2@2850.88,1325 ; C10.2@2851,1324.88 2925.88,1324.88 2989,1388 ; v1(3066,1705) 3066,1754 2917,1903 2917,2144 2886,2175 2664,2175 2570,2269 ; RF_DEBUG_SPI.1 3304,598 3627,275 3953,275 4116,438 4116,992 3966,1142 3652.91,1142 3587,1076.09 C14.2@3587,1016 ; U3.8 3610,966 3587,989 C14.2@3587,1016 ; 2989,1388 2990,1387 ; 2989,1388 2990,1388 2990,1387 ; 2990,1387 2990,1277 3030,1237 3356,1237 3577,1016 C14.2@3587,1016
  Bottom Layer w20: v1(2411,526) 2413,524 3047,524 RF_DEBUG_SPI.1@3115,592 ; v1(3066,1524) v1(3066,1705)
GAIN: GAIN_SEL.2 U4.10 | length 568.5
  Top Layer w10: v1(1582,581) 1582,690 1598,706 U4.10@1598,746
  Bottom Layer w10: v1(1582,581) 1579,581 1572,574 1746,400 1746,347 GAIN_SEL.2
GND: ATK/REL_SEL.3 C1.1 C2.1 C3.1 C4.1 C5.1 C6.1 C7.2 C8.2 C9.2 C10.1 C11.1 C12.1 C13.1 C14.1 C16.1 C17.2 C18.2 C19.1 C20.1 C21.1 C22.2 C23.1 C24.2 C25.1 C26.2 DEBUG.6 GAIN_SEL.3 GND.1 J1.GND J1.P$4 P0.1 R0.1 R2.1 R5.1 RF_DEBUG_SPI.6 SWD_DEBUG.5 U2.0 U2.37 U3.4 U4.4 U4.7 U4.11 U4.15 U5.2 U6.2 U7.8 U7.13 U7.17 U7.21 U8.1 U8.3 U8.8 U9.P$1 U9.P$16 U9.P$25 U9.P$40 U9.P$42 U9.P$44 U9.P$46 U9.P$48 U10.2 U10.4 uCAM_UART.4 Y1.2 | length 5775.7
  Top Layer w10: v1(1179.51,1919.49) P0.1 ; v1(1233,3220) 1318.33,3220 C9.2@1323.33,3215 ; J1.GND v1@1258,2416 ; C26.2 v1@1465.67,1611.67 ; J1.P$4 v1(1498.16,2424.16) ; C16.1@1503,929 C16.1 1509,934.44 v1(1509,988) ; v1(1503,1882) C21.1 ; v1@1510,825 v1(1510,805) ; U4.7@1567,864 1567,852 1555,840 1545,840 v1(1510,805) ; v1(1612,2568) 1613,2569 C25.1 ; U4.11@1614,746 U4.15@1614,805 ; U4.4@1614,864 U4.15@1614,805 ; C18.2 v1(1623,1050) ; C17.2@1636,604.44 1636,558 1637,559 1645,551 v1(1656,551) ; v1(1704,2899) U10.4@1832,2899 ; C19.1@1762.12,883 1762.12,790.88 v1(1763,790) ; R5.1@1764,717 v1@1764,790 ; U10.2@1830,2654 v1(1830,2740) ; v1(1895,2379) 1925.44,2409.44 C11.1 ; v1@1999,2506 U7.17 ; v2(2030,2894) v2(2104,2820) ; U7.13@2077,2608 2128,2608 2192,2544 v1(2192,2638) ; v2(2091,2950) 2164,2877 v2(2167,2877) ; R2.1 2158,1885 v1(2159,1884) ; v1(2204,1721) 2253.44,1721 2258.44,1716 C13.1 ; v1(2212.98,784.98) U9.P$25 ; C7.2@2291.34,3230 2435,3230 v1(2440,3225) ; v1@2304,1168 R0.1 ; U7.8@2307,2608 v1@2376,2608 ; U9.P$40 2354.8,46.8 v1(2393,85) ; v1(2392,2608) v1@2408,2608 ; C12.1@2417.44,2179 v1@2417.44,2221.56 ; Y1.2 2442.54,1866.54 2476,1900 v1(2500,1900) ; v1(2460,2310) 2465.12,2315.12 C6.1 ; C23.1 2510,2535 v1(2555,2580) ; U9.P$42 2552.14,292.86 v1(2586,259) ; U9.P$44 2572.93,342.07 v1@2585,330 ; U9.P$46 2498.72,395 v1(2586,395) ; U9.P$48 2536.5,440.5 2557,461 2568,461 2572,465 v1@2583,465 ; C3.1 2553,1718 2610,1775 2608,1777 v1(2601,1777) ; C2.1 2565,1225 v1(2570,1220) 2572.44,1222.44 C1.1 ; U2.0@2589,1433 2610.27,1411.73 U2.37 2653.27,1411.73 2675,1390 2670,1385 v1(2670,1375) ; v1(2650,2290) 2650,2390 2663,2403 U8.3 ; U8.1 U8.8 2921,2525 v1@2921,2540 ; C4.1@2750,1383 2757,1390 2757,1418 v1(2742,1433) 2768,1433 2808.5,1392.5 C5.1@2796,1380 ; C8.2 2770,1491 v1@2800.5,1460.5 ; U9.P$1 2858.04,44 2882,44 2952,114 v1(2952,129) ; U9.P$16 v1@2855.24,825.24 ; C10.1@2862,1378 2862,1408 v1(2805,1465) 2819.44,1479.44 C20.1 ; v2(2978,1570) 3135,1570 v2(3137,1568) ; v2(2980,1666) 2981,1665 v2(3137,1665) ; C24.2 v1@3037.34,3338.66 ; v1(3220,310) GND.1@3375,310 ; v1(3413,735) 3397,735 3415.12,753.12 U3.4 ; C14.1@3642.12,1016 v1(3697,1016) ; v1(3714,3348) 3714,3242.67 C22.2@3717.67,3239 ; v1(4125,3300) GND.1@4270,3300 ; v1(1510,805) U4.15@1614,805
  other v1: 2587,322 2586,465 2854,843 2305,1168 1476,1609 2416,2235 1260,2430 1993,2512 2918,2558 3035,3331
  other v2: 2423,1434 2448,1434 2474,1435 2501,1435 2527,1435 2554,1436 2584,1436 2423,1462 2448,1462 2474,1463 2501,1463 2527,1463 2554,1464 2584,1464 2423,1491 2448,1491 2474,1492 2501,1492 2527,1492 2554,1493 2584,1493 2423,1519 2448,1519 2474,1520 2501,1520 2527,1520 2554,1521 2584,1521 2423,1548 2448,1548 2474,1549 2501,1549 2527,1549 2554,1550 2584,1550 2423,1577 2448,1577 2474,1578 2501,1578 2527,1578 2554,1579 2584,1579 2423,1605 2448,1605 2474,1606 2501,1606 2527,1606 2554,1607 2584,1607
MEM_HOLD#: SPI_BUS.7 U2.32 U3.7 | length 1700
  Top Layer w10: U2.32 2529.53,1203.9 2562.43,1171 3337,1171 3556.22,951.78 3556.22,929.98 3588.2,898 U3.7 3755,898 SPI_BUS.7
MEM_WP#: SPI_BUS.2 U2.30 U3.3 | length 1923.9
  Top Layer w10: U2.30 2490.16,1190.84 2556,1125 2936,1125 v1(3087,974) ; v1(3243,818) 3273,848 U3.3 3457,848 3468.9,836.1 3468.9,754.1 3716,507 SPI_BUS.2
  Bottom Layer w10: v1(3087,974) v1(3243,818)
MIC_BIAS: R3.2 R4.2 U4.13 | length 510.4
  Top Layer w10: R3.2 1505.06,583.94 1582,507 1675,507 1701,533 R4.2 1701,666 1682.72,684.28 1645,717 U4.13@1645,746
MIC_IN: C15.2 U4.8 | length 83.6
  Top Layer w10: C15.2 1558,723 1567,732 U4.8@1567,746
NetC6_2: C6.2 R6.1 R11.1 U7.3 | length 239.5
  Top Layer w10: R6.1@2410,2479.53 R6.1
  Top Layer w12: U7.3 R6.1 ; R11.1@2350,2389.06 2379.06,2389.06 C6.2 R6.1@2410,2479.53
NetC7_1: C7.1 C9.1 C11.2 U7.15 U7.18 U10.3 VREG.1 | length 1650.2
  Top Layer w10: U10.3@1921,2631 U10.3 ; 2013,2558 2014,2557 U7.15 ; 2015,2465 2030,2480 U7.18
  Top Layer w20: C9.1@1657.67,3223 1669.67,3211 1956,3211 2165,3002 v1(2165,2950) ; VREG.1@1814.56,2464.56 C11.2@1942,2464.56 ; U10.3@1921,2631 1994,2558 2013,2558 ; U10.3 1921,2701 v1(2020,2800) ; 1946,2604 1946,2465 2015,2465
  Bottom Layer w20: v1(2020,2800) v1@2165,2945
NetC8_1: C8.1 U2.41 | length 65.9
  Top Layer w10: U2.41 2700.35,1490.47 C8.1
NetC15_1: C15.1 R3.1 U5.1 | length 295
  Top Layer w10: U5.1 1446,452 R3.1 C15.1
NetC17_1: C17.1 U4.12 | length 79.4
  Top Layer w10: C17.1@1630,666.56 U4.12@1630,746
NetC18_1: C18.1 U4.3 | length 75.9
  Top Layer w10: C18.1 1623,891 1630,884 U4.3 U4.3@1630,864
NetC19_2: C19.2 U4.1 | length 60.9
  Top Layer w10: U4.1@1661,864 U4.1 1661,876 1668,883 C19.2@1707,883
NetC23_2: C23.2 D2.2 U7.5 | length 432.2
  Top Layer w10: U7.5 2411,2531 C23.2 2446,2566 2446,2704 2388,2762 D2.2
NetC25_2: C25.2 J1.VIN0 U10.1 VIN.1 | length 809.7
  Top Layer w10: C25.2 C25.2@1739,2569.44
  Top Layer w20: J1.VIN0 J1.VIN0@1260,2784.41 ; VIN.1@1380,2906 VIN.1 1354,2885 1318,2885 1260,2827 J1.VIN0@1260,2784.41 ; C25.2@1739,2569.44 U10.1 1447,2644 1306.59,2784.41 J1.VIN0@1260,2784.41
NetC26_1: C26.1 MIC.1 R10.2 U4.6 | length 542.8
  Top Layer w10: MIC.1@1395,1068 MIC.1 ; MIC.1@1399.53,990 R10.2 1520.53,891 1574.14,891 1582,883.14 1582,883 1583,882 U4.6 U4.6@1583,864
  Top Layer w12: C26.1@1381,1334 1395,1320 MIC.1@1395,1068
NetD1_1: D1.1 L2.2 U8.7 | length 515.1
  Top Layer w10: U8.7 2929,2453 3024.72,2453 D1.1@3058,2419.72
  Top Layer w12: L2.2 2925.98,2633.02 2975,2584 2975,2499 U8.7@2929,2453
NetD3_1: D3.1 U2.23 | length 65.7
  Top Layer w10: D3.1 2312.42,1431.42 U2.23
NetD3_2: D3.2 R0.2 | length 55.5
  Top Layer w10: R0.2@2303,1299.53 D3.2
NetL1_1: L1.1 U7.20 | length 485.2
  Top Layer w10: L1.1 2071,2302.02 U7.20@2071,2428
NetL1_2: D2.1 L1.2 U7.19 | length 908.5
  Top Layer w10: L1.2 1859,2274 2038,2453 U7.19@2071,2453 ; U7.19 2109,2454 2135,2428 v1@2135,2380 ; v1@2178.66,2720 v1(2183.66,2725) 2218.66,2760 2247.66,2760 D2.1
  Bottom Layer w10: v1(2130,2375) 2130,2671.34 v1(2183.66,2725)
NetP5_2: RF_DEBUG_SPI.2 U9.P$47 | length 444.4
  Top Layer w10: U9.P$47 2717.22,440.5 v1@2751.86,475.14
  Bottom Layer w10: v1(2770,477) 2778,469 3080,469 RF_DEBUG_SPI.2
NetP5_3: RF_DEBUG_SPI.3 U9.P$45 | length 441.5
  Top Layer w10: U9.P$45 2756.28,391.28 v1(2770,405)
  Bottom Layer w10: v1(2770,405) 3102,405 RF_DEBUG_SPI.3
NetP5_4: RF_DEBUG_SPI.4 U9.P$43 | length 444.5
  Top Layer w10: U9.P$43 v1@2765.93,342.07
  Bottom Layer w10: v1(2768,331) 3075,331 3108,298 RF_DEBUG_SPI.4
NetP5_5: RF_DEBUG_SPI.5 U9.P$41 | length 472.2
  Top Layer w10: U9.P$41 2733.14,292.86 2761,265 v1(2768,265)
  Bottom Layer w10: v1(2768,265) 3042,265 RF_DEBUG_SPI.5
NetP6_2: SWD_DEBUG.2 U9.P$37 | length 185.3
  Top Layer w10: SWD_DEBUG.2@2159,263 2227.57,194.43 U9.P$37
NetP6_3: SWD_DEBUG.3 U9.P$35 | length 189.7
  Top Layer w10: SWD_DEBUG.3@2152.5,356.5 2216.14,292.86 U9.P$35
NetP6_4: SWD_DEBUG.4 U9.P$34 | length 210.8
  Top Layer w10: SWD_DEBUG.4@2152.5,456.5 2266.93,342.07 U9.P$34
NetP9_2: 3V_ISO.2 R6.2 | length 112.9
  Top Layer w10: 3V_ISO.2@2560,2450 3V_ISO.2
  Top Layer w20: R6.2 2530,2480 3V_ISO.2@2560,2450
NetP10_2: 5V_ISO.2 R7.1 | length 184.6
  Top Layer w20: 5V_ISO.2@3143,2027 3165,2049 R7.1
NetP11_2: U9.P$39 WIFI_PA_ISO.2 | length 1506.6
  Top Layer w20: WIFI_PA_ISO.2 1163,484 1550.99,96.01 U9.P$39
NetP12_1: PGOOD_ISO.1 R11.2 U7.9 | length 570.6
  Top Layer w10: PGOOD_ISO.1@2255,2335 R11.2@2340,2335 ; U7.9 2339,2634 v1(2380,2675)
  Bottom Layer w10: PGOOD_ISO.1 2265,2560 v1(2380,2675)
NetR1_1: R1.1 uCAM_UART.5 | length 216.2
  Top Layer w10: R1.1 4043.2,1884 uCAM_UART.5@4127,1800.2
NetR2_2: R2.2 S0.1 | length 117.6
  Top Layer w10: S0.1 1987.1,1813.9 2044.47,1871.27 R2.2
NetR4_1: R4.1 R5.2 U4.14 | length 156.8
  Top Layer w10: U4.14@1661,746 1661,734 1678,717 1704.94,717 1704.94,701.11 R4.1
NetR8_1: R8.1 R12.1 | length 79.4
  Top Layer w10: R8.1 2562.94,1881.53 R12.1
NetR9_1: R9.1 U2.17 | length 242.1
  Top Layer w10: R9.1@2124.53,1545 2129.06,1549.53 U2.17
NetR9_2: R9.2 SENSE.1 U6.3 | length 481
  Top Layer w10: 1845,1218 1845,1428 U6.3 1967,1550 R9.2
NetR10_1: R10.1 U2.19 | length 1299
  Top Layer w10: v1(1406,918) 1444,880 R10.1 ; v1(1742,1101) 1913,1101 2322.16,1510.16 U2.19
  Bottom Layer w10: v1@1406,919 1406,979 1528,1101 v1(1742,1101)
NetU2_10: U2.10 Y1.3 | length 314.8
  Top Layer w10: U2.10 2431.1,1728.9 2388,1772 2388,1888.16 Y1.3
NetU2_11: U2.11 Y1.4 | length 339.6
  Top Layer w10: Y1.4 2305,1891.77 2305,1820 2411.42,1713.58 U2.11
NetU2_35: U2.35 Y2.2 | length 312.6
  Top Layer w10: U2.35 2588.58,1362.17 2671.72,1279.03 2702.97,1279.03 2747,1235 Y2.2
NetU2_36: U2.36 Y2.1 | length 406.9
  Top Layer w10: U2.36 2608.27,1369.34 2682.61,1295 2884.06,1295 Y2.1
RST: C13.2 DEBUG.5 PGOOD_ISO.2 RST.P$1 S0.3 U2.12 | length 1263.9
  Top Layer w10: RST.P$1@1881,1675 2029,1675 2082,1622 2235,1622 2315.56,1702.56 C13.2 ; PGOOD_ISO.2 2321,2230 2360,2191 DEBUG.5 2267,1937 2267,1776 2315.56,1727.44 C13.2 ; U2.12@2391.52,1655.02 2391.52,1678.48 2352,1718 C13.2
SPI0_CLK: SPI_BUS.6 U2.27 U3.6 U9.P$14 | length 2221.3
  Top Layer w10: U2.27 2431.1,1172.9 2601,1003 v1(2601,945) ; v1(2640,736) 2689.44,686.56 U9.P$14 2920.56,686.56 3238,1004 3468,1004 3536.22,935.78 3536.22,899.98 3588.2,848 U3.6 3805,848 SPI_BUS.6
  Bottom Layer w10: v1(2601,945) 2601,775 v1(2640,736)
SPI0_INT: SPI_BUS.1 U2.29 U9.P$11 | length 2504.8
  Top Layer w10: U2.29 2470.47,1186.53 2561,1096 2598,1096 2610,1084 v1(2623,1084) ; v1(2481,661) 2573,569 2768,569 2798.08,538.92 U9.P$11 ; U9.P$11@2890,538 2931,538 3061,668 3386,668 3647,407 ; 3646,407 3647,407 ; SPI_BUS.1 3647,407
  Bottom Layer w10: v1(2481,661) 2435,707 2435,934 2536,1035 2587,1035 2623,1071 v1(2623,1084)
SPI0_MEM_CS: SPI_BUS.4 U2.31 U3.1 | length 2691.3
  Top Layer w10: U2.31 2509.84,1198.16 2561,1147 3144,1147 3171,1120 v1(3208,1120) ; U3.1 3436.92,948 3468.9,916.02 3468.9,903 3508.9,863 3508.9,819.1 3621,707 SPI_BUS.4
  Bottom Layer w10: v1(3208,1120) 3843,1120 3973,990 3973,739 3941,707 SPI_BUS.4
SPI0_RX: SPI_BUS.3 U2.26 U3.2 U9.P$13 | length 2798.6
  Top Layer w10: U2.26 2411.42,1165.58 2545,1032 v1(2545,974) ; v1@2567,713 2578,713 2653.65,637.35 U9.P$13 2937.35,637.35 v1@3060.5,760.5 ; U3.2 3415.12,889.72 3423.4,898 3436.92,898 3488.9,846.02 3488.9,769.1 3651,607 SPI_BUS.3
  Bottom Layer w10: v1(2545,974) 2545,758 v1(2572,731) ; v1@3054,761 v1(3057,764) 3301,764 3458,607 SPI_BUS.3
SPI0_TX: SPI_BUS.5 U2.25 U3.5 U9.P$12 | length 2378.3
  Top Layer w10: U2.25 2391.73,1029.27 v1(2496,925) ; v1(2504,725) 2511,718 2511,709 2631.87,588.13 U9.P$12 2937.7,588.13 3327.57,978 3456.92,978 3516.22,918.7 3516.22,883.96 3545,855.18 3545,829 3576,798 U3.5@3582.1,804.1 ; U3.5 3855,798 SPI_BUS.5
  Bottom Layer w10: v1(2496,925) 2504,917 v1(2504,725)
SPI0_WIFI_CS: U2.28 U9.P$15 WIFI_CS.P$1 | length 1040.5
  Top Layer w10: U2.28 2450.79,1180.21 2677,954 v1(2677,936) ; v1(2704,738) 2837.01,738 2845.01,746 U9.P$15 2933.77,735.77 2949,751 WIFI_CS.P$1
  Bottom Layer w10: v1(2677,936) 2677,765 v1(2704,738)
SWCLK: DEBUG.1 SWCLK.P$1 U2.1 | length 530
  Top Layer w10: U2.1 2760,1806.97 DEBUG.1 2759,2031 SWCLK.P$1
SWDIO: DEBUG.2 SWDIO.P$1 U2.2 | length 538.3
  Top Layer w10: U2.2 2588.58,1671.74 2599.01,1682.17 2713,1796.16 2713,1977 DEBUG.2 SWDIO.P$1
SWO: DEBUG.3 SWO.P$1 U2.3 | length 559.9
  Top Layer w10: SWO.P$1 2560,2121 DEBUG.3 2676,1914 2676,1786 2650,1760 2650,1759.43 2626.57,1736 2626,1736 2568.9,1678.9 U2.3
UART1_RX: P8.1 U2.45 uCAM_UART.2 | length 1301.7
  Top Layer w10: U2.45 2656.21,1569.21 2716,1629 3310.57,1629 P8.1 3638.61,1611.81 uCAM_UART.2@3827,1800.2
UART1_TX: P8.2 U2.44 uCAM_UART.3 | length 1479
  Top Layer w10: U2.44 2665.53,1549.53 2717,1601 3207.69,1601 3296.88,1511.81 P8.2 3654.81,1511.81 3927,1784 uCAM_UART.3@3927,1800.2
VBAT: C21.2 C24.1 L2.1 P0.2 U7.1 U7.2 U7.16 U8.2 U8.6 VBAT.1 WIFI_PA_ISO.1 | length 6962.2
  Top Layer w10: C21.2 C21.2@1503,1998.23 ; C21.2@1515.77,1998.23 C21.2@1516,1998
  Top Layer w12: U7.16 2112,2531 2126,2517 2126,2474.79 2146.79,2454 2190,2454 ; 2197,2454 U7.2 2307,2454 U7.1@2307,2429
  Top Layer w20: WIFI_PA_ISO.1@1163,783 1163,1593 1332,1762 1521.43,1762 1548.72,1789.28 ; P0.2 1503,1998.23 1545,2040.23 1545,2171 1537.5,2163.5 1516.5,2163.5 1353,2327 1353,2611 1295,2669 1201,2669 1153,2717 1153,2898 1265.31,3010.31 1978.69,3010.31 2154,2835 2621,2835 L2.1 ; C21.2@1516,1998 1537,1998 1548.72,1986.28 1548.72,1789.28 ; 2190,2454 2190,2249 1710,1769 1569,1769 1548.72,1789.28 ; U8.2 2662,2453 2634,2481 2634,2559 2700,2625 L2.1 ; U8.2@2739,2452 2788,2403 U8.6 ; C24.1 2700,3180 L2.1
VCC: U7.6 U7.7 U7.10 U7.11 U7.12 U7.14 | length 565
  Top Layer w10: U7.14@2077,2582 U7.14 2035,2582 2024,2593 2024,2624 2034,2634 U7.12 2077,2634 2077,2659 2143,2659 2162,2678 2219,2678 2238,2659 U7.10 U7.10@2307,2659 ; 2271.79,2656 2255,2639.21 2255,2598 2271,2582 U7.7 2307,2582 U7.6@2307,2557
pads on no net: J1.1 J1.VIN1 P0.P1 P0.P2 S0.2 S0.4 U2.4 U2.5 U2.6 U2.7 U2.8 U2.13 U2.14 U2.15 U2.16 U2.18 U2.20 U2.21 U2.22 U2.24 U2.33 U2.38 U2.43 U2.46 U2.47 U2.48 U7.4 U8.5 U9.P$2 U9.P$3 U9.P$4 U9.P$5 U9.P$6 U9.P$7 U9.P$8 U9.P$9 U9.P$10 U9.P$17 U9.P$18 U9.P$19 U9.P$20 U9.P$21 U9.P$22 U9.P$23 U9.P$26 U9.P$27 U9.P$28 U9.P$29 U9.P$30 U9.P$31 U9.P$32 U9.P$33 U9.P$36 U9.P$49 U9.P$50 U9.P$51 U9.P$52 uCamIII.1 uCamIII.2 uCamIII.3 uCamIII.4 Y1.1

## Polygon pours and split planes (outlines as drawn)
GND on Bottom Layer "Bottom Layer-No Net" (solid, pour order 9): 995,3515 4505,3515 4505,5 4510,0 2725.85,0 2723.35,2.5 2723.35,140.3 2447.75,140.3 2447.75,2.5 997.5,2.5 995,0

## Silkscreen, mask and mechanical layers (free items; w line width, h text height)
Top Overlay:
  text "UART_RX" at 3400,1580 h40
  text "UART_TX" at 3400,1480 h40
  text "MEM_HLD#" at 3954,987 h40
  text "SPI_CLK" at 3954,885.33 h40
  text "SPI_TX" at 3954,783.67 h40
  text "MEM_CS" at 3954,682 h40
  text "SPI_RX" at 3954,580.33 h40
  text "MEM_WP#" at 3954,478.67 h40
  text "WIFI_INT" at 3954,377 h40
  text "Team 3ER" at 3590.95,199 h40
  text "PanoptiNode" at 3487,139 h40
  text "V1.0" at 3765,80 h40
  text "!" at 3939,26 h300
Mechanical 3 (Mech8):
  lines w10: 995,4 995,3515 4505,3515 4505,4 995,4
Drill Drawing:
  circle w10: c1127.72,5059.33 r33.33
  lines w10: 1094.39,4126 1094.39,4142.67 1111.06,4159.33 1094.39,4176 1094.39,4192.67 1111.06,4192.67 1127.72,4176 1144.39,4192.67 1161.06,4192.67 1161.06,4176 1144.39,4159.33 1161.06,4142.67 1161.06,4126 1144.39,4126 1127.72,4142.67 1111.06,4126 1094.39,4126 ; 1094.39,4276 1127.72,4292.67 1161.06,4276 1144.39,4309.33 1161.06,4342.67 1127.72,4326 1094.39,4342.67 1111.06,4309.33 1094.39,4276 ; 1094.39,4426 1161.06,4426 1161.06,4492.67 1094.39,4492.67 1094.39,4426 ; 1094.39,4609.33 1127.72,4576 1161.06,4609.33 1127.72,4642.67 1094.39,4609.33 ; 1094.39,4742.67 1111.06,4742.67 1127.72,4726 1144.39,4742.67 1161.06,4742.67 1144.39,4759.33 1161.06,4776 1144.39,4776 1127.72,4792.67 1111.06,4776 1094.39,4776 1111.06,4759.33 1094.39,4742.67 ; 1094.39,4892.67 1111.06,4892.67 1111.06,4876 1144.39,4876 1144.39,4892.67 1161.06,4892.67 1161.06,4926 1144.39,4926 1144.39,4942.67 1111.06,4942.67 1111.06,4926 1094.39,4926 1094.39,4892.67
  lines w15: 1034.6,4081 8910.46,4081 ; 1034.6,5131 8910.46,5131 ; 1585.48,3931 1585.48,5281 ; 2175.32,3931 2175.32,5281 ; 3275,3931 3275,5281 ; 3780.88,3931 3780.88,5281 ; 4514.68,3931 4514.68,5281 ; 6014.23,3931 6014.23,5281 ; 6604.08,3931 6604.08,5281 ; 7349.88,3931 7349.88,5281 ; 7999.7,3931 7999.7,5281 ; 1034.6,3931 8910.46,3931 8910.46,5281 1034.6,5281 1034.6,3931
  text "Symbol" at 1124.6,5176 h72
  text "Count" at 1630.48,5176 h72
  text "Hole Size" at 2220.32,5176 h72
  text "Plated" at 3320,5176 h72
  text "Hole Type" at 3825.88,5176 h72
  text "Drill Layer Pair" at 4559.68,5176 h72
  text "Via/Pad" at 6059.23,5176 h72
  text "Pad Shape" at 6649.08,5176 h72
  text "Template" at 7394.88,5176 h72
  text "Hole Length" at 8044.7,5176 h72
  text "57" at 1630.48,5026 h60
  text "10.00mil (0.254mm)" at 2220.32,5026 h60
  text "PTH" at 3320,5026 h60
  text "Round" at 3825.88,5026 h60
  text "Top Layer - Bottom Layer" at 4559.68,5026 h60
  text "Via" at 6059.23,5026 h60
  text "Rounded" at 6649.08,5026 h60
  text "v51h25" at 7394.88,5026 h60
  text "-" at 8044.7,5026 h60
  text "3" at 1630.48,4876 h60
  text "18.00mil (0.457mm)" at 2220.32,4876 h60
  text "PTH" at 3320,4876 h60
  text "Round" at 3825.88,4876 h60
  text "Top Layer - Bottom Layer" at 4559.68,4876 h60
  text "Pad" at 6059.23,4876 h60
  text "Rounded" at 6649.08,4876 h60
  text "c102h46" at 7394.88,4876 h60
  text "-" at 8044.7,4876 h60
  text "80" at 1630.48,4726 h60
  text "28.00mil (0.711mm)" at 2220.32,4726 h60
  text "PTH" at 3320,4726 h60
  text "Round" at 3825.88,4726 h60
  text "Top Layer - Bottom Layer" at 4559.68,4726 h60
  text "Via" at 6059.23,4726 h60
  text "Rounded" at 6649.08,4726 h60
  text "v127h71" at 7394.88,4726 h60
  text "-" at 8044.7,4726 h60
  text "2" at 1630.48,4576 h60
  text "31.50mil (0.800mm)" at 2220.32,4576 h60
  text "PTH" at 3320,4576 h60
  text "Round" at 3825.88,4576 h60
  text "Top Layer - Bottom Layer" at 4559.68,4576 h60
  text "Pad" at 6059.23,4576 h60
  text "(Mixed)" at 6649.08,4576 h60
  text "(Mixed)" at 7394.88,4576 h60
  text "-" at 8044.7,4576 h60
  text "45" at 1630.48,4426 h60
  text "35.43mil (0.900mm)" at 2220.32,4426 h60
  text "PTH" at 3320,4426 h60
  text "Round" at 3825.88,4426 h60
  text "Top Layer - Bottom Layer" at 4559.68,4426 h60
  text "Pad" at 6059.23,4426 h60
  text "(Mixed)" at 6649.08,4426 h60
  text "(Mixed)" at 7394.88,4426 h60
  text "-" at 8044.7,4426 h60
  text "2" at 1630.48,4276 h60
  text "80.00mil (2.032mm)" at 2220.32,4276 h60